# EAGLE board ExternSensors (EAGLE 9.5.0)
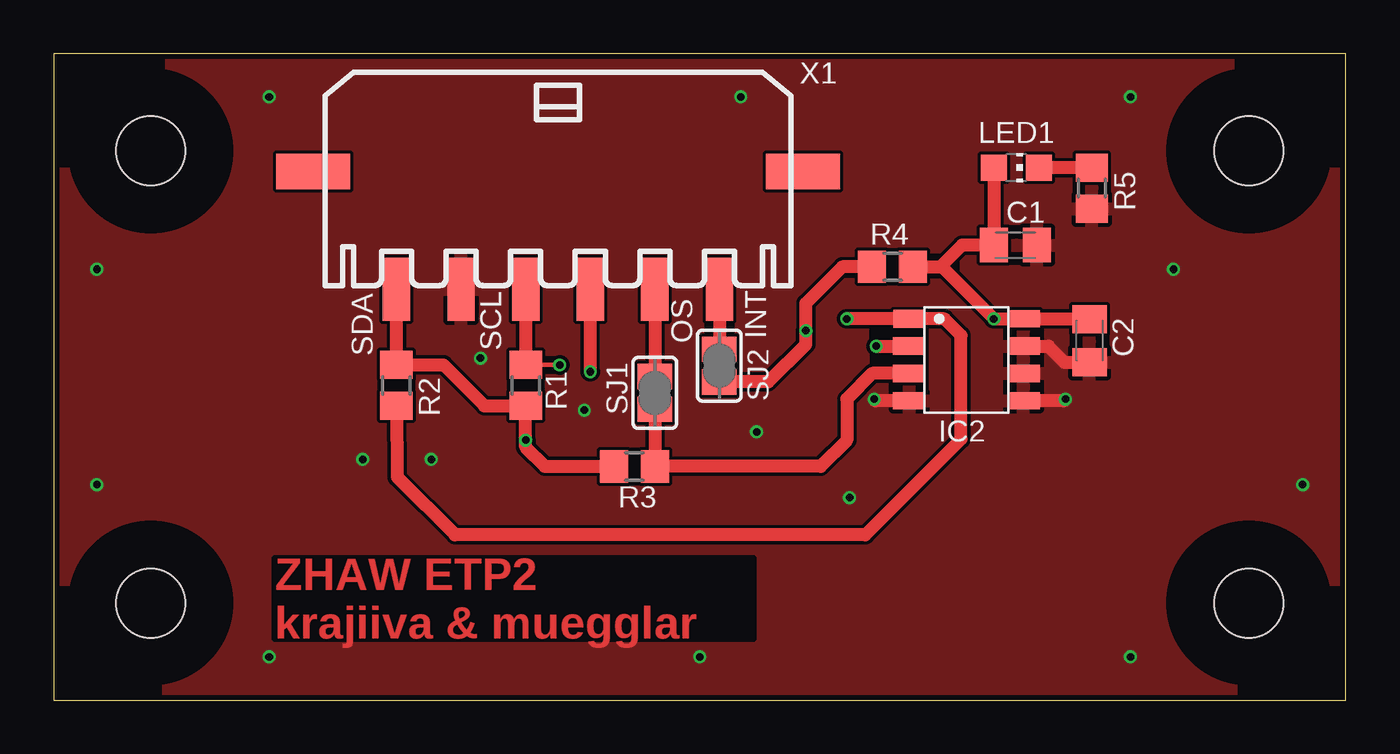
[diagram p0: board, top side]
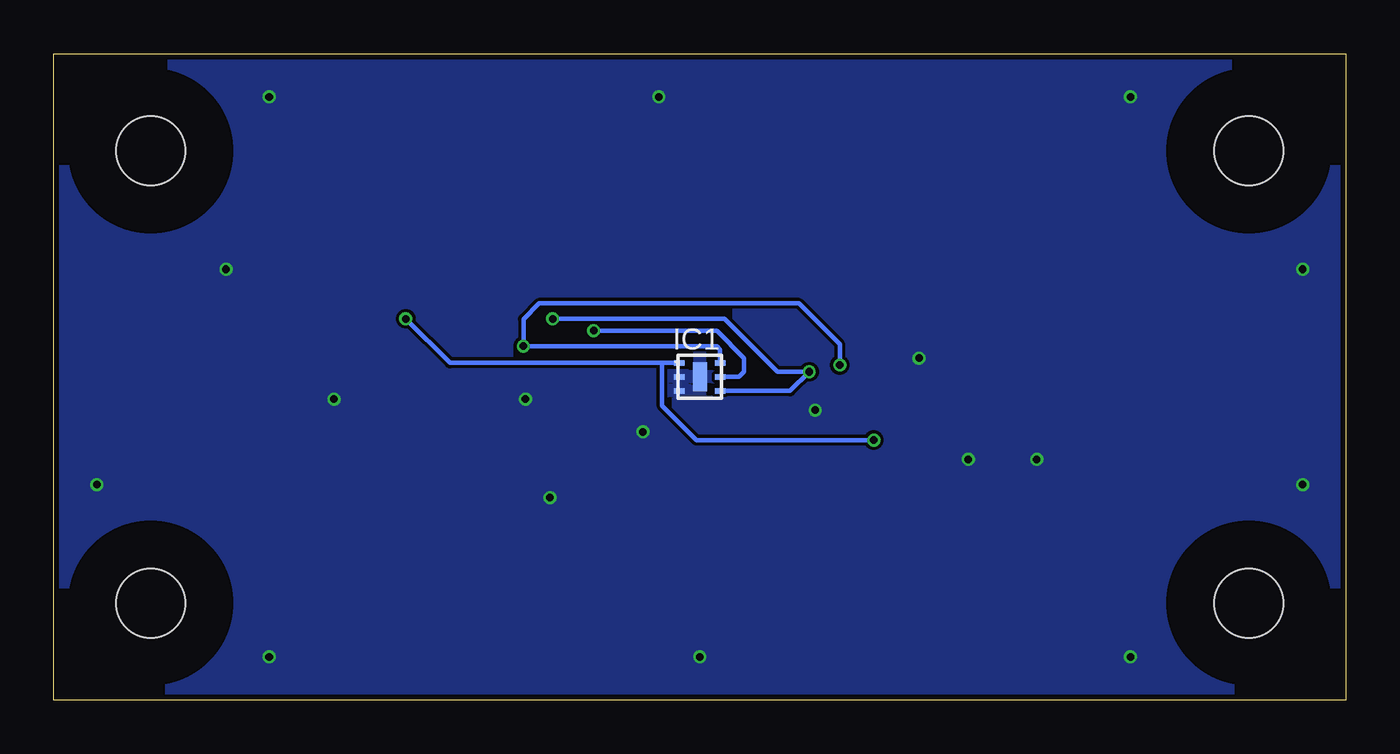
[diagram p1: board, bottom side, seen from below]

Size 60 x 30 mm. Coordinates in mm from the lower left corner, seen from the top.
Outline: 0,0 60,0 60,30 0,30 0,0
Copper layers (1*16): Top 0.018mm / dielectric 1.55mm / Bottom 0.018mm
Design rules "default": minimum track width 0.15mm, minimum drill 0.35mm, track to track 0.15mm, track to pad 0.15mm, pad to pad 0.15mm, via to via 0.15mm, smd to smd 0mil, copper to edge 0.25mm, drill to drill 0.35mm, minimum pad ring 0.175mm, minimum via ring 0.125mm, stop-mask expansion 0mil, vias tented up to drill 0.45mm, thermal gap 0.2mm
Holes 3.2 mm at 4.5,25.5 4.5,4.5 55.5,4.5 55.5,25.5
tRestrict: area 0.8,0.8 to 8.2,8.2; area 0.8,21.8 to 8.2,29.2; area 51.8,21.8 to 59.2,29.2; area 51.8,0.8 to 59.2,8.2
bRestrict: area 0.8,21.8 to 8.2,29.2; area 0.8,0.8 to 8.2,8.2; area 51.8,21.8 to 59.2,29.2; area 51.8,21.8 to 59.2,29.2; area 0.8,21.8 to 8.2,29.2; area 51.8,0.8 to 59.2,8.2; area 0.8,21.8 to 8.2,29.2

## Footprints (pad centres in the part's own frame; a part is rotated, then mirrored left to right if it is on the bottom)
C0805K = smd 1.3 x 1.6: 1 -1,0; 2 1,0
OPT3001 = smd 0.5 x 0.25: 1 -0.95,0.65; 2 -0.95,0; 3 -0.95,-0.65; 4 0.95,0.65; 5 0.95,0; 6 0.95,-0.65 | smd 0.65 x 1.35: P$1 0,0
SO8_LM75 = smd 0.802 x 1.505: 1 -1.905,-2.65; 2 -0.635,-2.65; 3 0.635,-2.65; 4 1.905,-2.65; 5 1.905,2.65; 6 0.635,2.65; 7 -0.635,2.65; 8 -1.905,2.65
CHIP-LED0805 = smd 1.2 x 1.2: A 0,-1.05; C 0,1.05
R0805 = smd 1.3 x 1.5: 1 -0.95,0; 2 0.95,0
SJ = smd 1.168 x 1.6: 1 -0.762,0; 2 0.762,0
43650-0612 = smd 1.27 x 2.92: P$1 7.5,5.48; P$2 4.5,5.48; P$3 1.5,5.48; P$4 -1.5,5.48; P$5 -4.5,5.48; P$6 -7.5,5.48 | smd 3.43 x 1.65: TAB1 11.38,0; TAB2 -11.38,0

## Placement (x,y rotation side)
C1  0.1u  [C0805K]  44.66,21.11 180 top
C2  0.1u  [C0805K]  48.1,16.68 90 top
IC1  OPT3001  [OPT3001]  30,15 0 bottom
IC2  LM75BD  [SO8_LM75]  42.38,15.79 270 top
LED1  GREEN  [CHIP-LED0805]  44.71,24.72 270 top
R1  10k  [R0805]  21.91,14.61 90 top
R2  10k  [R0805]  15.91,14.61 270 top
R3  10k  [R0805]  26.96,10.84 0 top
R4  10k  [R0805]  38.96,20.11 180 top
R5  220  [R0805]  48.21,23.77 270 top
SJ1  [SJ]  27.91,14.26 90 top
SJ2  [SJ]  30.91,15.53 90 top
X1  [43650-0612]  23.41,24.54 180 top

## Library data of the parts
C1 C2 = rcl; SPICEPREFIX: C
IC1 = opt3001
IC2 = lm75
LED1 = led
R1-R5 = rcl; SPICEPREFIX: R
SJ1 SJ2 = jumper
X1 = con-molex-micro-fit-3_0

## Nets
+3V3: C1.2 C2.2 IC1.1 IC2.8 LED1.A R1.1 R2.1 R3.1 R4.1 X1.P$1
GND: C1.1 C2.1 IC1.2 IC1.3 IC1.P$1 IC2.4 IC2.5 IC2.6 IC2.7 R5.2 X1.P$2
N$1: LED1.C R5.1
N$2: SJ2.2 X1.P$6
N$22: IC1.4 IC2.2 R1.2 X1.P$3
N$23: IC1.6 IC2.1 R2.2 X1.P$4
N$24: IC2.3 R3.2 SJ1.1
N$25: IC1.5 R4.2 SJ2.1
N$26: SJ1.2 X1.P$5

## Tracks (layer width: path | path; a pad name or v marks a point on that pad's centre or on a via)
+3V3  (via drill 0.35)
  Top 0.6: C2.2 48.08,17.7 IC2.8 v43.66,17.7 41.24,20.11 R4.1 41.18,20.11 42.18,21.11 C1.2 LED1.A | R3.1 22.81,10.84 21.91,11.74 v21.91,12.06 R1.1 20,13.65 18.1,15.55 R2.1 X1.P$1
  Bottom 0.2: IC1.1 31.75,15.65 | 31.75,15.65 41.6,15.65 v43.66,17.7 | 31.75,15.65 31.75,13.65 30.16,12.06 v21.91,12.06
GND  (via drill 0.35)
  Top 0.6: IC2.7 46.2,16.43 46.96,15.67 48.08,15.67 C2.1 | IC2.4 38.18,13.89 v38.1,13.97 | v46.99,13.97 46.91,13.89 IC2.5
  other vias: 10,2 30,2 50,2 58,10 52,20 50,28 31.91,28 10,28 2,20 2,10 14.35,11.18 17.53,11.18 32.64,12.45 19.81,15.88 24.64,13.46 36.96,9.4
  pour Top: -0.56,30.61 60.96,30.61 60.96,-0.89 -0.38,-0.89 -1.47,0.2
  pour Bottom: -1.12,30.48 60.83,30.48 60.83,-0.64 -0.25,-0.64 -0.38,-0.76
N$1
  Top 0.6: R5.1 LED1.C
N$2
  Top 0.6: X1.P$6 SJ2.2
N$22  (via drill 0.35)
  Top 0.2: R1.2 v23.5,15.55
  Top 0.6: v38.19,16.43 IC2.2 | X1.P$3 R1.2
  Bottom 0.2: IC1.4 29.05,16.27 29.21,16.43 v38.19,16.43 38.19,17.69 37.47,18.41 25.4,18.41 23.5,16.51 v23.5,15.55
N$23  (via drill 0.35)
  Top 0.6: R2.2 15.96,10.35 18.64,7.67 37.69,7.67 42.14,12.12 42.14,16.93 41.37,17.7 IC2.1 v36.83,17.7 | X1.P$4 v24.91,15.24
  Bottom 0.2: IC1.6 25.8,14.35 v24.91,15.24 26.4,15.24 28.86,17.7 v36.83,17.7
N$24
  Top 0.6: IC2.3 38.02,15.16 36.83,13.97 36.83,12.06 35.61,10.84 R3.2 SJ1.1
N$25  (via drill 0.35)
  Top 0.6: R4.2 36.62,20.11 34.92,18.41 v34.92,17.14 34.92,16.51 33.18,14.77 SJ2.1
  Bottom 0.2: IC1.5 28.18,15 27.94,15.24 27.94,15.88 29.21,17.14 v34.92,17.14
N$26
  Top 0.6: X1.P$5 SJ1.2

## Text on the board
Top: ZHAW ETP2 / krajiiva & muegglar
tNames: X1 | OS | INT | SDA | SCL